# EAGLE board Tapuino (EAGLE 7.2.0)
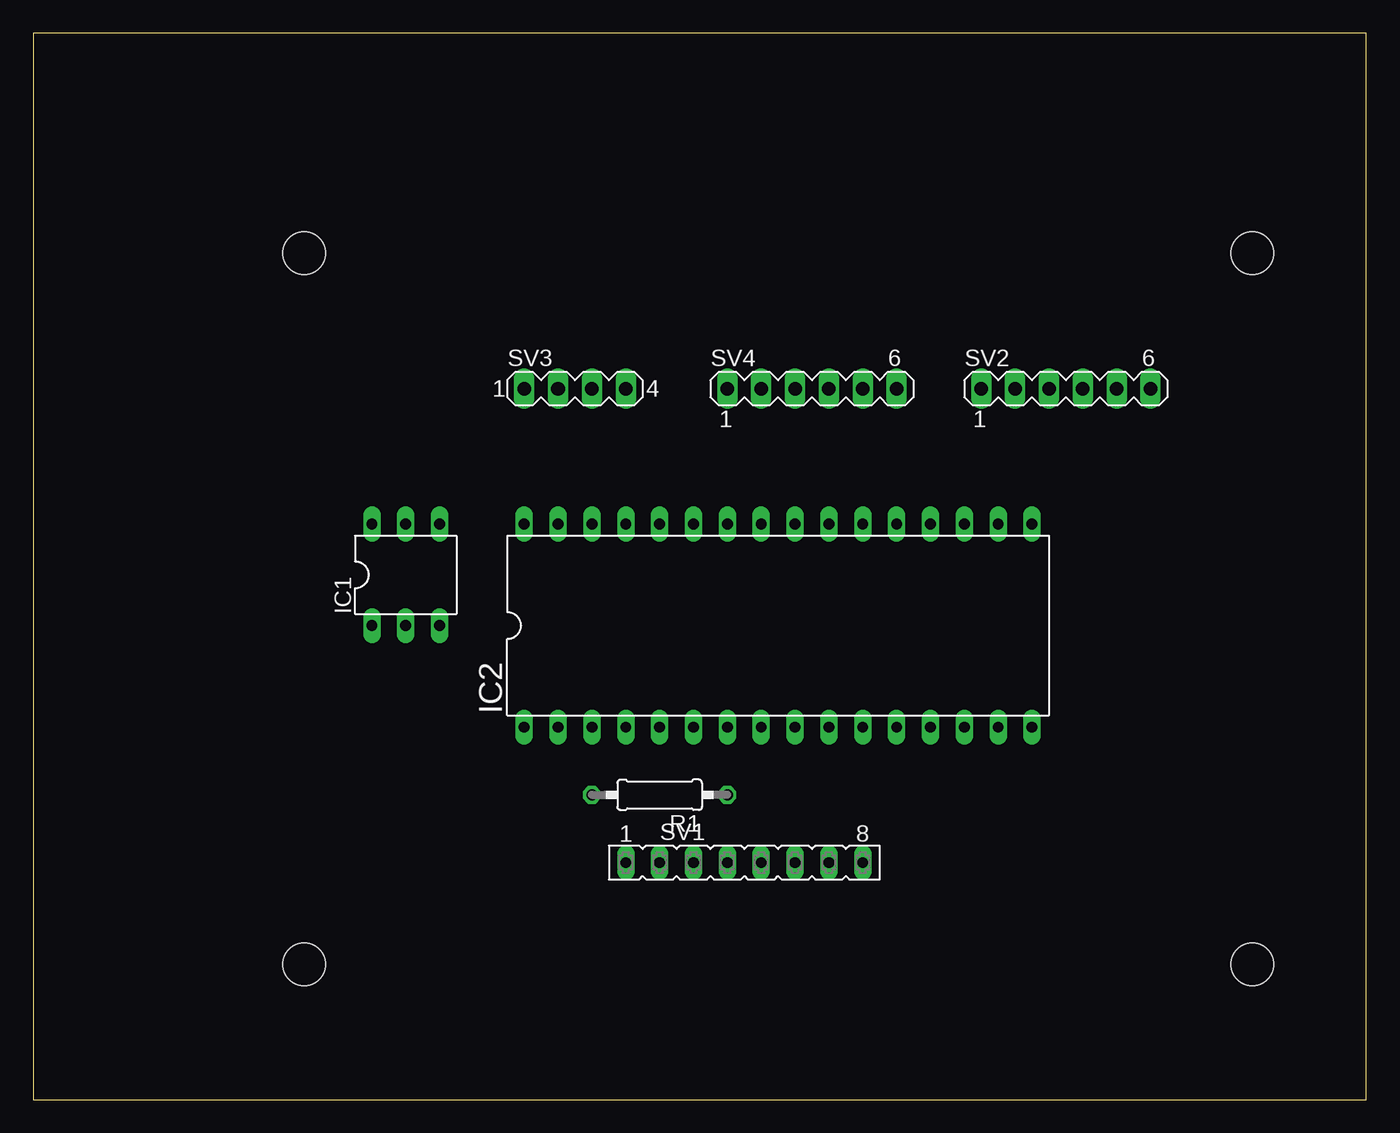
[diagram p0: board, top side]
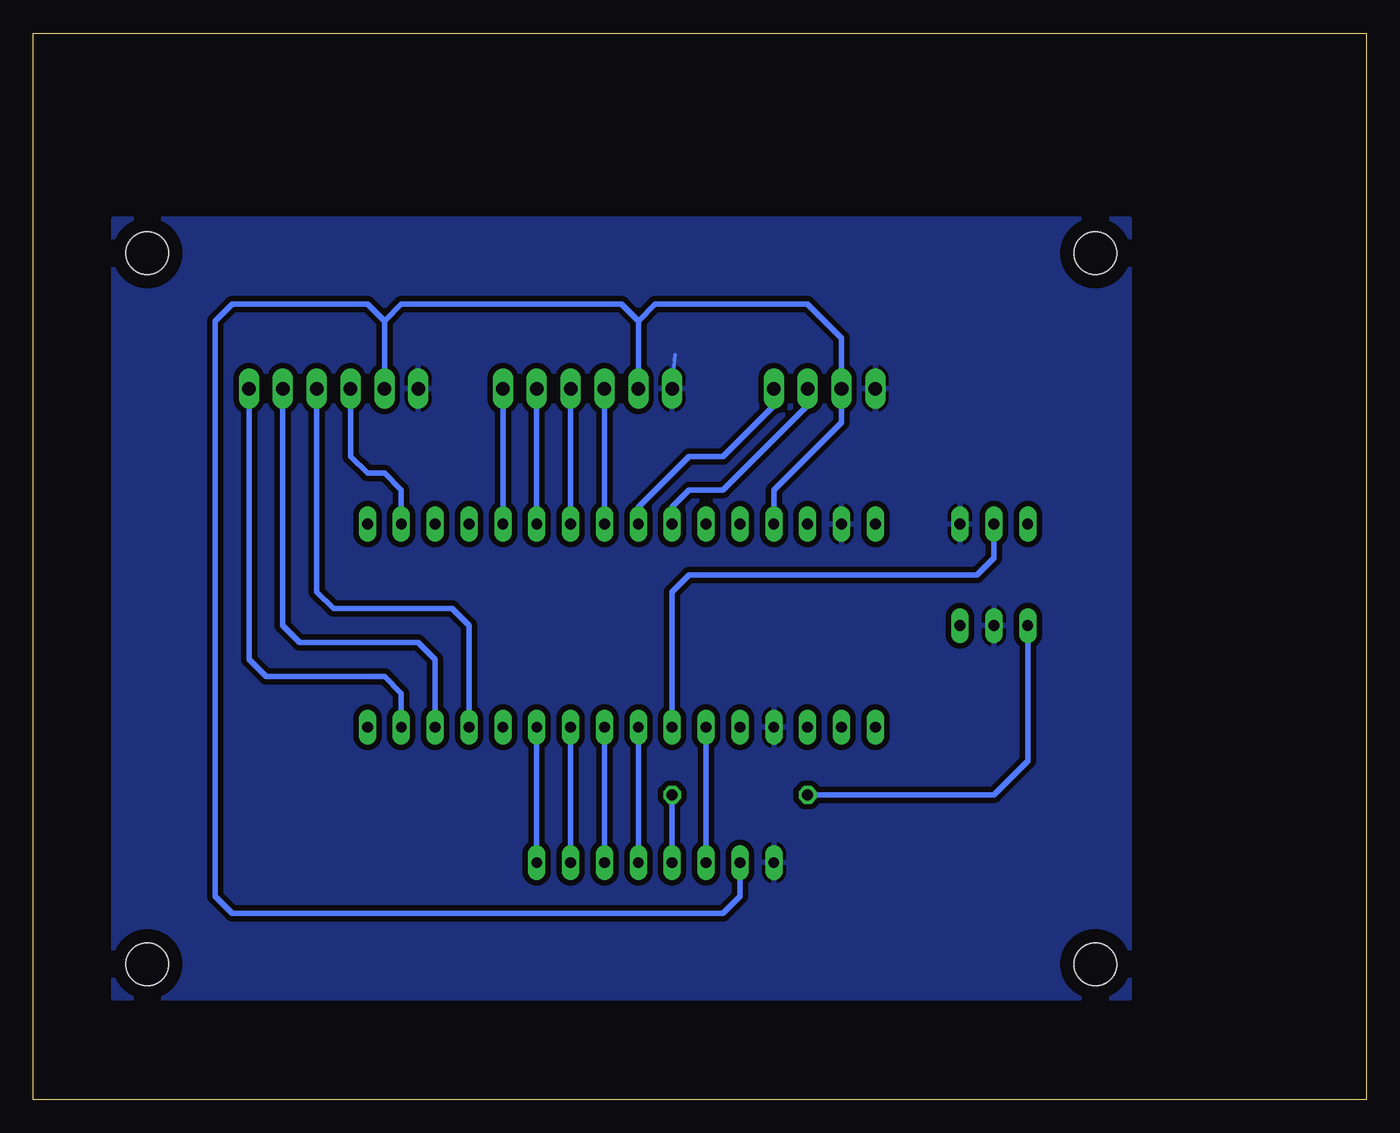
[diagram p1: board, bottom side, seen from below]

Size 100 x 80 mm. Coordinates in mm from the lower left corner, seen from the top.
Outline: 0,0 100,0 100,80 0,80 0,0
Copper layers (1*16): Top 0.035mm / dielectric 1.5mm / Bottom 0.035mm
Design rules "default": minimum track width 10mil, minimum drill 24mil, track to track 8mil, track to pad 8mil, pad to pad 8mil, via to via 8mil, smd to smd 8mil, copper to edge 40mil, drill to drill 8mil, minimum pad ring 10mil, minimum via ring 8mil, stop-mask expansion 4mil, vias tented up to drill 0mil, thermal gap 10mil
Holes 3.2 mm at 20.32,63.5 91.44,63.5 91.44,10.16 20.32,10.16

## Footprints (pad centres in the part's own frame; a part is rotated, then mirrored left to right if it is on the bottom)
DIL06 = drill 0.813 long: 1 -2.54,-3.81; 2 0,-3.81; 3 2.54,-3.81; 4 2.54,3.81; 5 0,3.81; 6 -2.54,3.81
DIL32 = drill 0.813 long: 1 -19.05,-7.62; 2 -16.51,-7.62; 3 -13.97,-7.62; 4 -11.43,-7.62; 5 -8.89,-7.62; 6 -6.35,-7.62; 7 -3.81,-7.62; 8 -1.27,-7.62; 9 1.27,-7.62; 10 3.81,-7.62; 11 6.35,-7.62; 12 8.89,-7.62; 13 11.43,-7.62; 14 13.97,-7.62; 15 16.51,-7.62; 16 19.05,-7.62; 17 19.05,7.62; 18 16.51,7.62; 19 13.97,7.62; 20 11.43,7.62; 21 8.89,7.62; 22 6.35,7.62; 23 3.81,7.62; 24 1.27,7.62; 25 -1.27,7.62; 26 -3.81,7.62; 27 -6.35,7.62; 28 -8.89,7.62; 29 -11.43,7.62; 30 -13.97,7.62; 31 -16.51,7.62; 32 -19.05,7.62
0207/10 = drill 0.813 octagon: 1 -5.08,0; 2 5.08,0
FE08 = drill 0.813 long: 1 -8.89,0; 2 -6.35,0; 3 -3.81,0; 4 -1.27,0; 5 1.27,0; 6 3.81,0; 7 6.35,0; 8 8.89,0
MA06-1 = drill 1.016 long: 1 -6.35,0; 2 -3.81,0; 3 -1.27,0; 4 1.27,0; 5 3.81,0; 6 6.35,0
MA04-1 = drill 1.016 long: 1 -3.81,0; 2 -1.27,0; 3 1.27,0; 4 3.81,0

## Placement (x,y rotation side)
IC1  Opto  [DIL06]  27.94,39.37 0 top
IC2  Nano  [DIL32]  55.88,35.56 0 top
R1  430  [0207/10]  46.99,22.86 180 top
SV1  BUS  [FE08]  53.34,17.78 0 top
SV2  SDCard  [MA06-1]  77.47,53.34 0 top
SV3  Disp  [MA04-1]  40.64,53.34 0 top
SV4  Buttons  [MA06-1]  58.42,53.34 0 top

## Library data of the parts
IC1 IC2 = ic-package
R1 = rcl
SV1 = con-lsta; OC_FARNELL: unknown; OC_NEWARK: unknown
SV2-SV4 = con-lstb; OC_FARNELL: unknown; OC_NEWARK: unknown

## Nets
GND: IC1.2 IC1.4 IC2.4 IC2.31 SV1.1 SV2.1 SV3.1 SV4.1
N$1: R1.1 SV1.4
N$2: IC2.29 SV1.2 SV2.2 SV3.2 SV4.2
N$4: IC2.6 SV1.3
N$5: IC1.1 R1.2
N$6: IC1.5 IC2.7
N$7: IC2.8 SV1.5
N$8: IC2.9 SV1.6
N$9: IC2.10 SV1.7
N$10: IC2.11 SV1.8
N$11: IC2.14 SV2.5
N$12: IC2.15 SV2.6
N$13: IC2.25 SV3.4
N$14: IC2.13 SV2.4
N$16: IC2.24 SV4.3
N$17: IC2.26 SV3.3
N$18: IC2.21 SV4.6
N$19: IC2.23 SV4.4
N$20: IC2.22 SV4.5
N$22: IC2.18 SV2.3

## Tracks (layer width: path | path; a pad name or v marks a point on that pad's centre or on a via)
GND
  Bottom 0.254: 51.87,55.91 SV4.1
  pour Bottom (isolate 0.406): 17.78,66.04 93.98,66.04 93.98,7.62 17.78,7.62
N$1
  Bottom 0.254: 51.89,17.83 SV1.4
  Bottom 0.406: R1.1 SV1.4
N$2
  Bottom 0.406: 73.66,58.42 SV2.2 | SV1.2 46.99,15.24 48.26,13.97 85.09,13.97 86.36,15.24 86.36,58.42 85.09,59.69 74.93,59.69 73.66,58.42 | 54.61,58.42 53.34,59.69 41.91,59.69 39.37,57.15 SV3.2 39.37,50.8 44.45,45.72 IC2.29 | 54.61,58.42 SV4.2 | 54.61,58.42 55.88,59.69 72.39,59.69 73.66,58.42
N$4
  Bottom 0.406: SV1.3 IC2.6
N$5
  Bottom 0.406: IC1.1 25.4,25.4 27.94,22.86 R1.2
N$6
  Bottom 0.406: IC1.5 27.94,40.64 29.21,39.37 50.8,39.37 52.07,38.1 IC2.7
N$7
  Bottom 0.406: IC2.8 SV1.5
N$8
  Bottom 0.406: SV1.6 IC2.9
N$9
  Bottom 0.406: IC2.10 SV1.7
N$10
  Bottom 0.406: SV1.8 IC2.11
N$11
  Bottom 0.406: IC2.14 69.85,33.02 71.12,34.29 80.01,34.29 81.28,35.56 SV2.5
N$12
  Bottom 0.406: IC2.15 72.39,30.48 73.66,31.75 82.55,31.75 83.82,33.02 SV2.6
N$13
  Bottom 0.406: SV3.4 44.45,52.07 48.26,48.26 50.8,48.26 54.61,44.45 IC2.25
N$14
  Bottom 0.406: IC2.13 67.31,35.56 68.58,36.83 77.47,36.83 78.74,38.1 SV2.4
N$16
  Bottom 0.406: SV4.3 IC2.24
N$17
  Bottom 0.406: SV3.3 41.91,52.07 48.26,45.72 50.8,45.72 52.07,44.45 IC2.26
N$18
  Bottom 0.406: SV4.6 IC2.21
N$19
  Bottom 0.406: SV4.4 IC2.23
N$20
  Bottom 0.406: SV4.5 IC2.22
N$22
  Bottom 0.406: IC2.18 72.39,45.72 73.66,46.99 74.93,46.99 76.2,48.26 SV2.3